# Allegro board DA_Convertor.brd
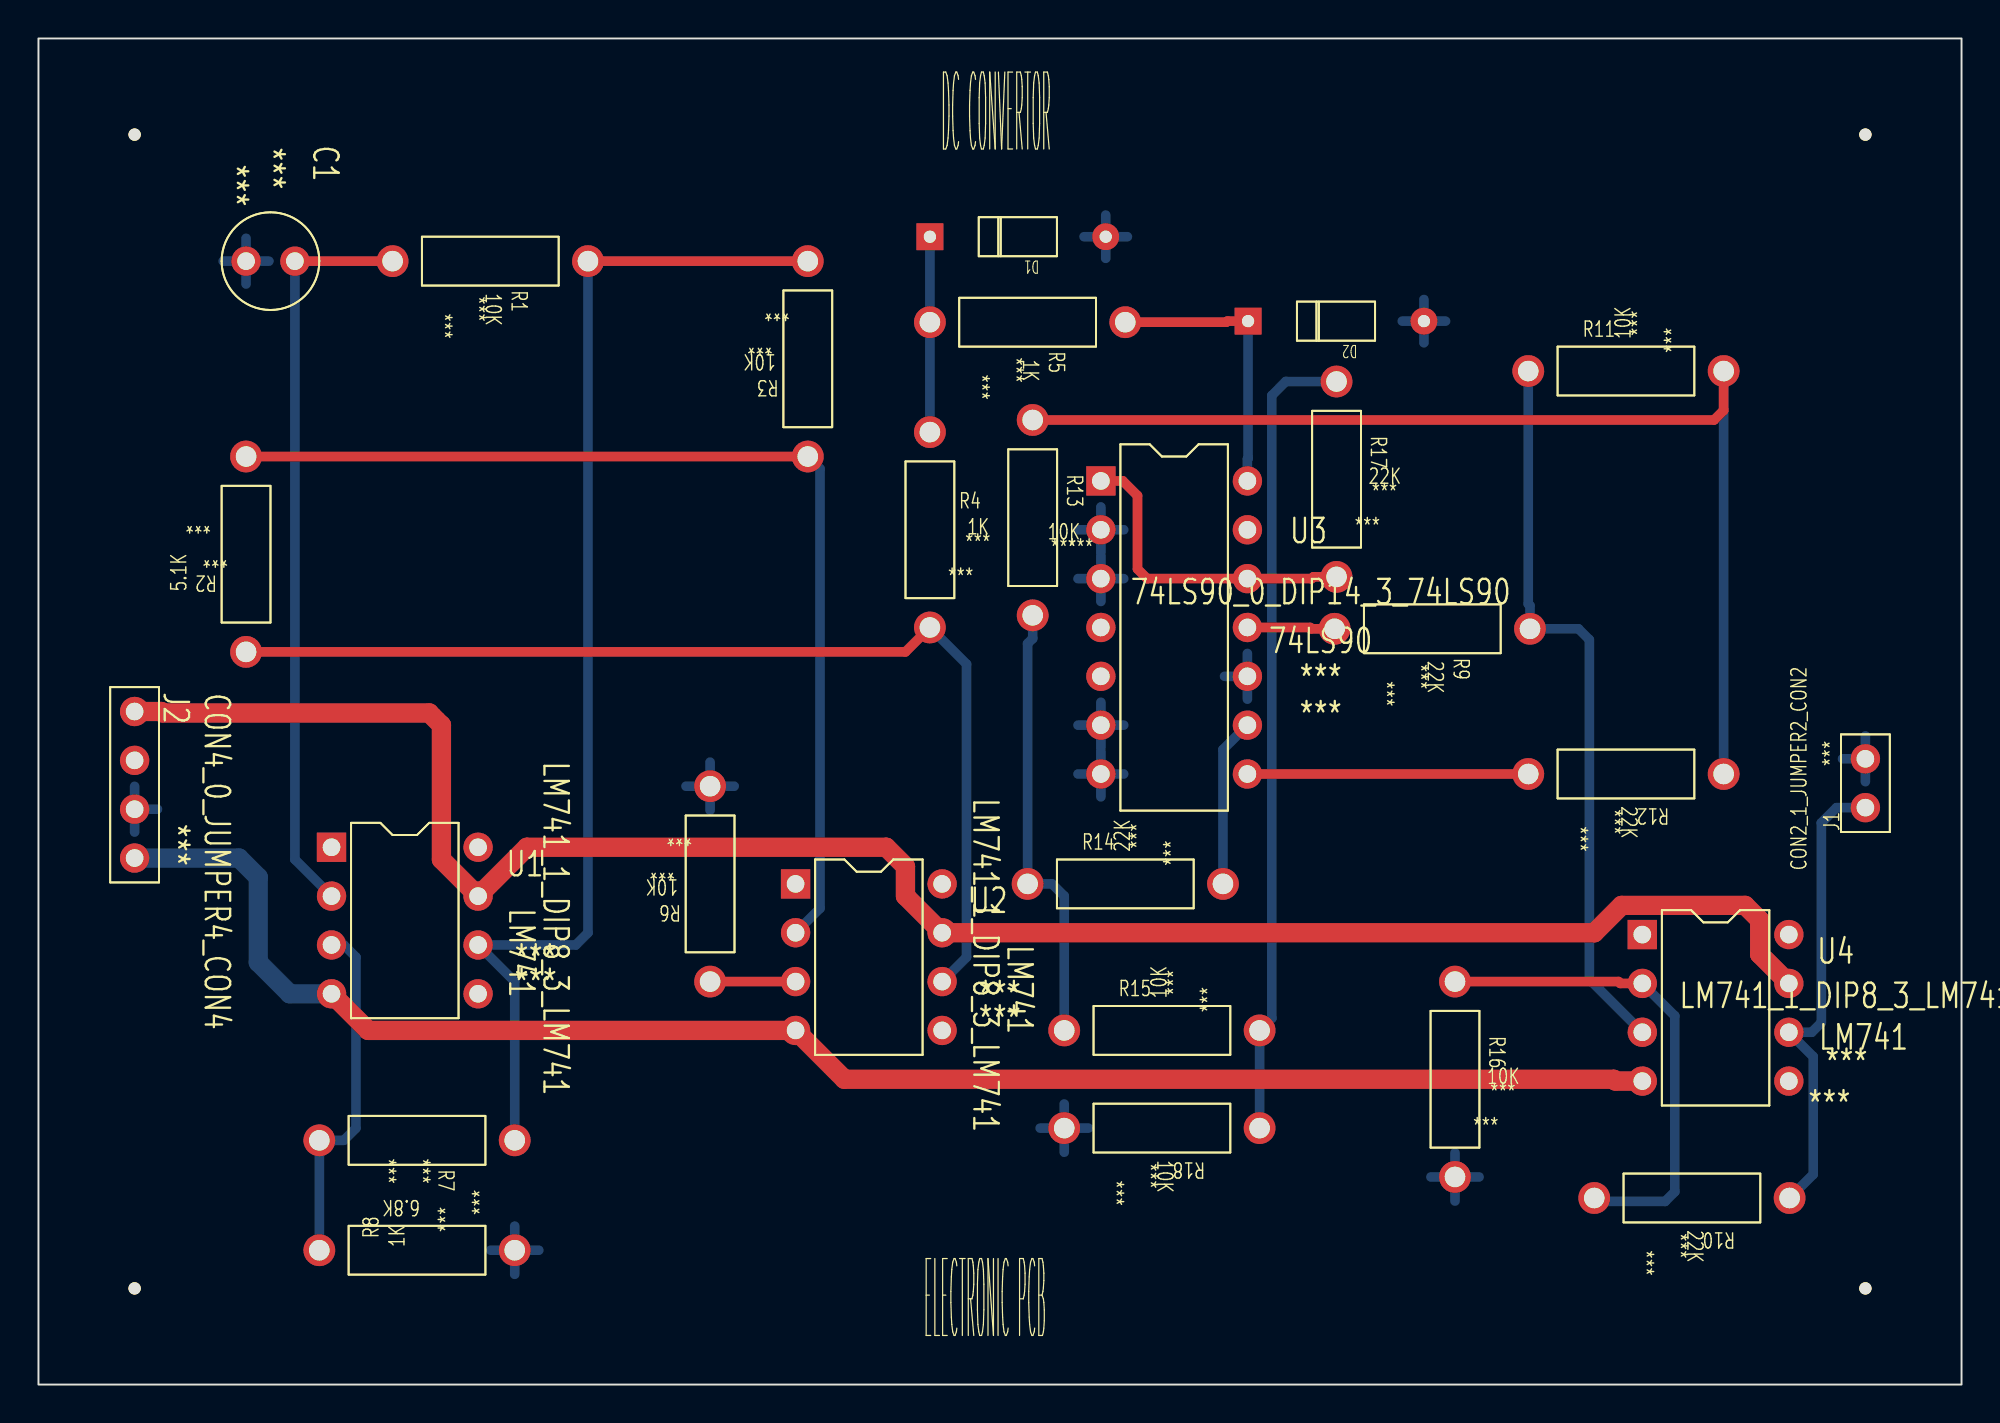
[diagram p0: board, top side]
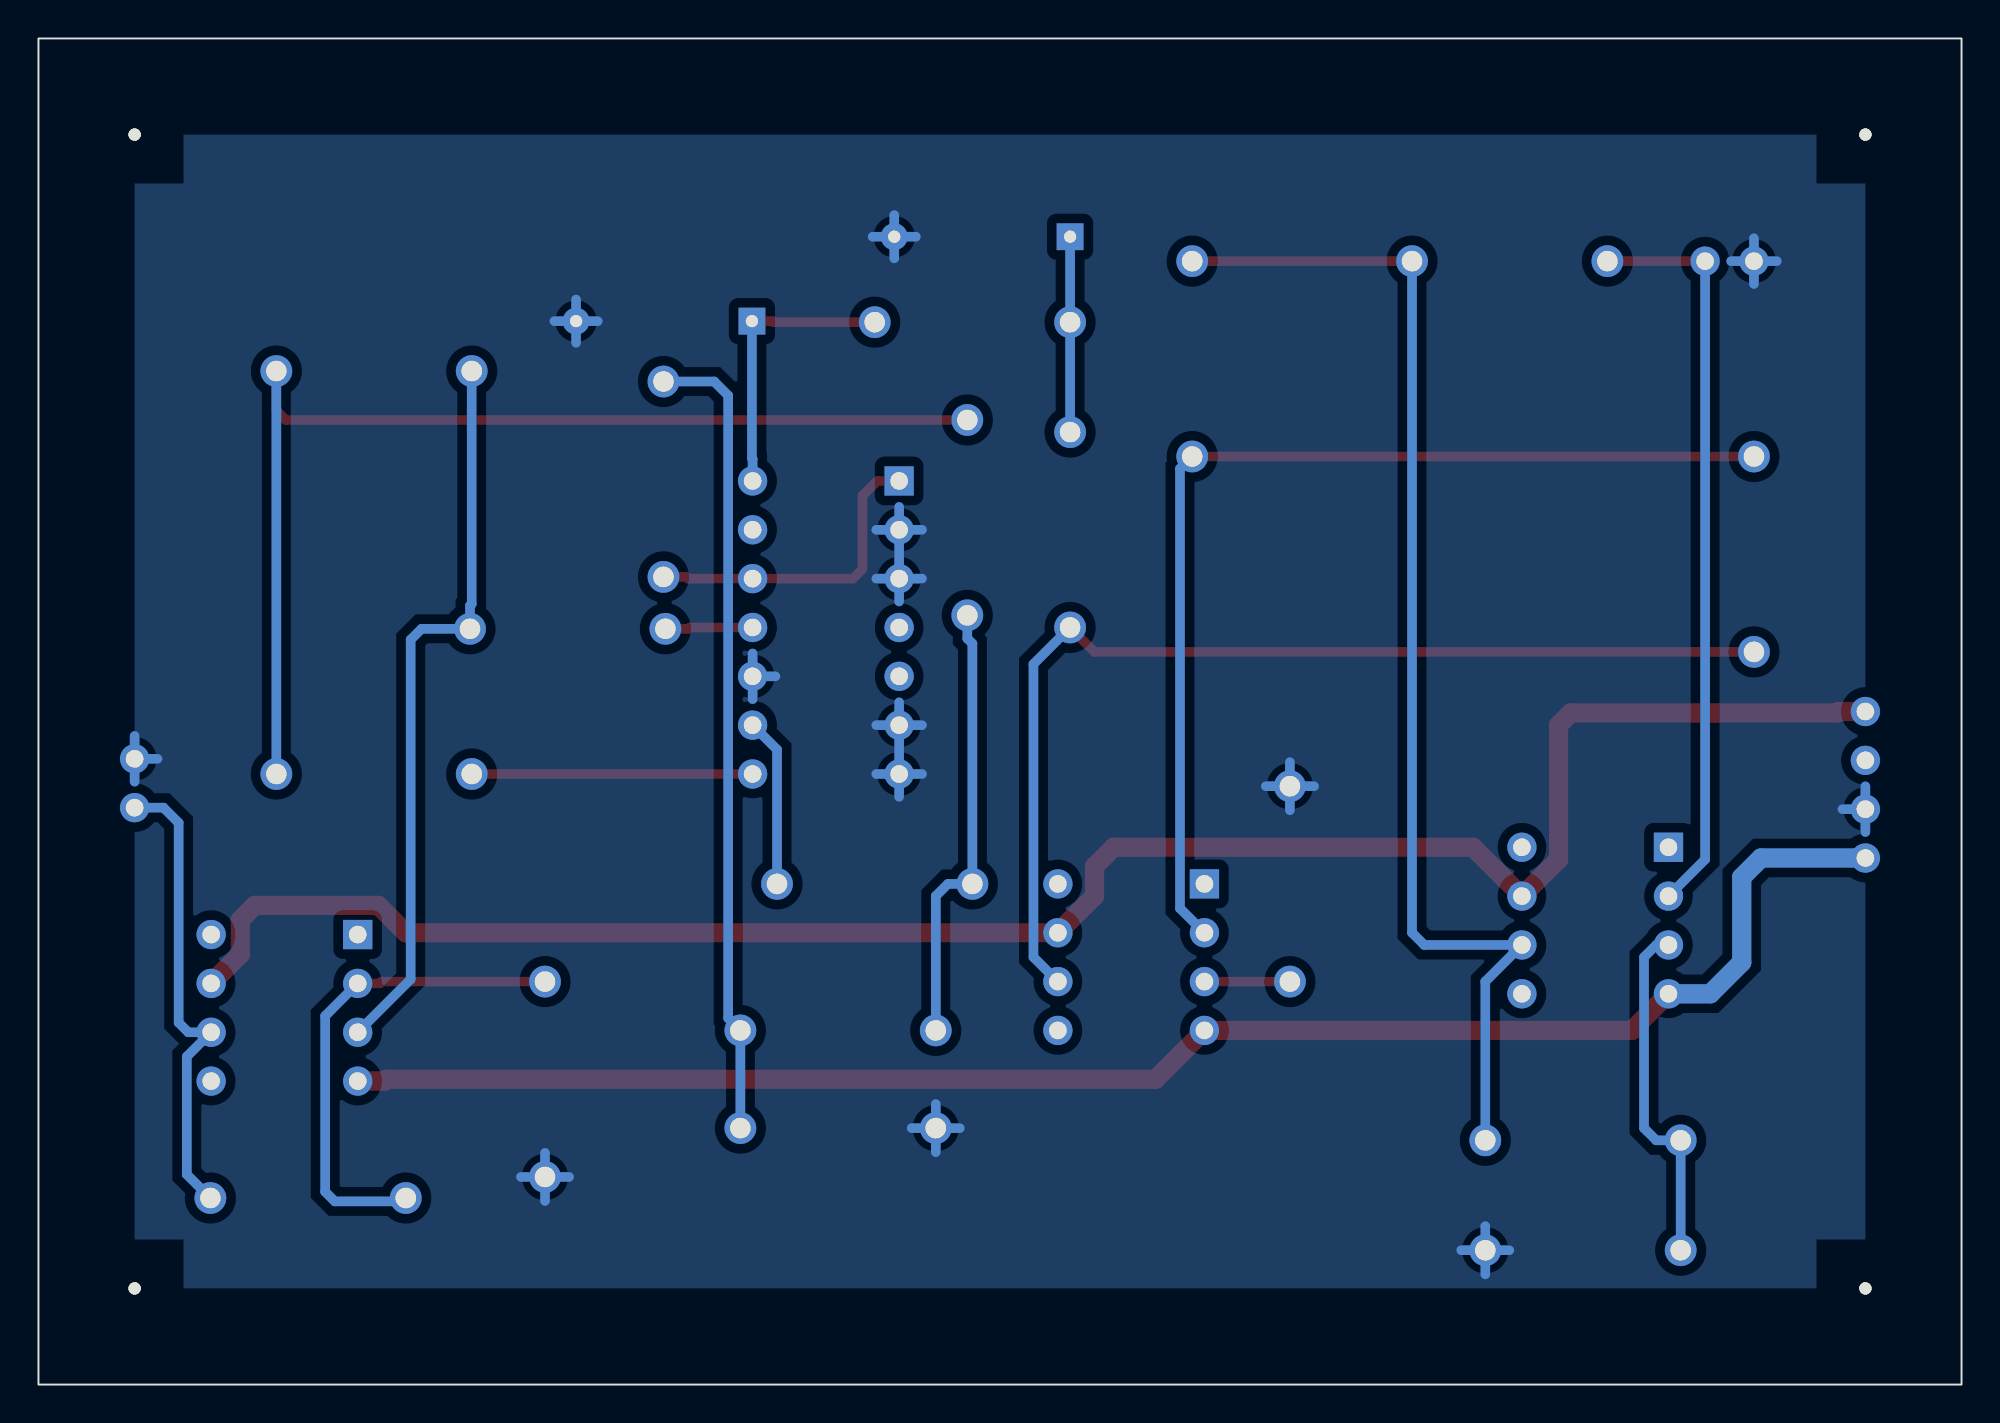
[diagram p1: board, bottom side, seen from below]

Outline 100 x 70 mm; copper layers: TOP, BOTTOM. Coordinates in mm from the lower left corner of the outline.
Outline path: rectangle 0,0 100,70

## Design rules (mm)
constraint set DEFAULT: min track width 0.5, pair gap 0.5
net group POWERNETS: nets +5V +12V -12V

## Placement (name value [footprint] x y rotation side)
C1  0.01uF  [CAP196]  10.79 58.42 270 top
D1  1N4148  [DO35]  46.35 59.69 270 top
D2  RD 5.6A  [DO35]  62.9 55.3 270 top
J1  CON2  [JUMPER2]  95 30 90 top
J2  CON4  [JUMPER4]  5 35 270 top
NOREF  -  [unnamed]  95 5 0 top
NOREF#2  -  [unnamed]  5 65 0 top
NOREF#3  -  [#2]  100 0 90 top
NOREF#4  -  [unnamed]  95 65 0 top
NOREF#5  -  [unnamed]  5 5 0 top
NOREF#6  -  [#2]  0 70 0 top
R1  10K  [RES400]  18.41 58.42 270 top
R2  5.1K  [RES400]  10.79 48.26 180 top
R3  10K  [RES400]  40.01 58.42 180 top
R4  1K  [RES400]  46.35 39.37 0 top
R5  1K  [RES400]  46.35 55.24 270 top
R6  10K  [RES400]  34.92 31.11 180 top
R7  6.8K  [RES400]  14.61 12.7 270 top
R8  1K  [RES400]  24.77 6.99 90 top
R9  22K  [RES400]  67.4 39.3 270 top
R10  22K  [RES400]  80.9 9.7 270 top
R11  10K  [RES400]  87.63 52.7 90 top
R12  22K  [RES400]  77.47 31.75 270 top
R13  10K  [RES400]  51.7 40 0 top
R14  22K  [RES400]  61.59 26.04 90 top
R15  10K  [RES400]  63.5 18.41 90 top
R16  10K  [RES400]  73.66 10.79 0 top
R17  22K  [RES400]  67.5 42 0 top
R18  10K  [RES400]  53.34 13.34 270 top
U1  LM741  [DIP8_3]  15.24 27.94 0 top
U2  LM741  [DIP8_3]  39.37 26.04 0 top
U3  74LS90  [DIP14_3]  55.24 46.99 0 top
U4  LM741  [DIP8_3]  83.4 23.4 0 top

## Library data of the parts
C1 = C: Tolerance: ***; User Part Number: ***
D1 = DIODE
D2 = DIODE BREAKDOWN_0
J1 = CON2_1: User Part Number: ***
J2 = CON4_0: User Part Number: ***
R1-R18 = R: Tolerance: ***; User Part Number: ***
U1 U2 U4 = LM741_1: Tolerance: ***; User Part Number: ***
U3 = 74LS90_0: Tolerance: ***; User Part Number: ***

## Footprints (pads in the part's own frame, mm; a bottom-side part is the same pattern mirrored in y, then rotated)
CAP196
  round 1.524 hole 0.914: 1(0,0) 2(0,2.54)
DIP8_3
  rect 1.524x1.524 hole 0.914: 1(0,0)
  round 1.524 hole 0.914: 2(0,-2.54) 3(0,-5.08) 4(0,-7.62) 5(7.62,-7.62) 6(7.62,-5.08) 7(7.62,-2.54) 8(7.62,0)
DIP14_3
  rect 1.524x1.524 hole 0.914: 1(0,0)
  round 1.524 hole 0.914: 2(0,-2.54) 3(0,-5.08) 4(0,-7.62) 5(0,-10.16) 6(0,-12.7) 7(0,-15.24) 8(7.62,-15.24) 9(7.62,-12.7) 10(7.62,-10.16) 11(7.62,-7.62) 12(7.62,-5.08) 13(7.62,-2.54) 14(7.62,0)
DO35
  rect 1.397x1.397 hole 0.635: 1(0,0)
  round 1.397 hole 0.635: 2(0,9.144)
JUMPER2
  round 1.524 hole 0.914: 1(0,0) 2(2.54,0)
JUMPER4
  round 1.524 hole 0.914: 1(0,0) 2(2.54,0) 3(5.08,0) 4(7.62,0)
RES400
  round 1.651 hole 1.067: 1(0,0) 2(0,10.16)
unnamed
  round 0.635 hole 3.175 unplated: (0,0)

## Nets
+5V: J2.2
+12V: J2.1 U1.7 U2.7 U4.7
-12V: J2.4 U1.4(V-) U2.4(V-) U4.4(V-)
GND: C1.1 D1.2 D2.2 J1.2 J2.3 R6.1 R8.1 R16.1 R18.1 U3.2 U3.3 U3.6 U3.7(R92) U3.10
VCC: U3.5
CLK: D2.1(CATHODE) R5.2 U3.14
OUT: J1.1 R10.2 U4.6
SIG: R9.2 R11.2 U4.3
N00203: R17.1 U3.1 U3.12
N00235: R14.1 U3.9
N00250: R12.1 U3.8
N00254: R9.1 U3.11
N00531: D1.1(K) R4.2 R5.1
N01054: R2.1 R3.2 U2.2
N01088: R1.2 R3.1 R7.2 U1.6
N01160: C1.2 R1.1 U1.2
N01196: R7.1 R8.2 U1.3
N01370: R2.2 R4.1 U2.6
N01517: R6.2 U2.3
N02715: R15.1 R17.2 R18.2
N02816: R13.1 R14.2 R15.2
N02968: R10.1 R16.2 U4.2
N025510: R11.1 R12.2 R13.2

Pads without a net: U1 1 5 8; U2 1 5 8; U3 4 13; U4 1 5 8

## Routing (per net, layer and track width the routed paths; a pad name or vN(x,y) marks a point on that pad's centre or on a via; arc(x,y) is an arc through that point)
+12V: length 101.2
  TOP w1: J2.1 6.39,35 6.46,34.92 20.32,34.92 20.95,34.29 20.95,27.3 U1.7 25.4,27.94 44.09,27.94 45.09,26.94 45.09,25.4 U2.7 80.9,23.5 82.33,24.92 88.75,24.92 89.5,24.16 89.5,22.38 U4.7
-12V: length 85.8
  TOP w1: U4.4 82.01,15.78 81.92,15.88 41.91,15.88 U2.4 17.14,18.41 U1.4
  BOTTOM w1: J2.4 10.43,27.38 11.43,26.38 11.43,21.95 13.06,20.32 U1.4
GND: length 63.5
  BOTTOM w0.5: C1.1 11.98,58.42 ; C1.1 9.61,58.42 ; C1.1 10.79,59.61 ; C1.1 10.79,57.23 ; R18.1 54.59,13.34 ; R18.1 53.34,12.08 ; R18.1 52.09,13.34 ; R18.1 53.34,14.59 ; 55.24,40.72 U3.3 ; U3.3 54.06,41.91 ; U3.3 55.24,43.1 ; U3.3 56.43,41.91 ; J1.2 95,33.73 ; J1.2 95,31.35 ; J1.2 93.81,32.54 ; 55.5,59.69 55.5,60.81 ; 55.5,59.69 56.62,59.69 ; 55.5,59.69 55.5,58.56 ; 55.5,59.69 54.37,59.69 ; 34.92,29.86 R6.1 ; R6.1 34.92,32.37 ; R6.1 36.18,31.11 ; R6.1 33.67,31.11 ; U3.2 55.24,45.64 ; U3.2 56.43,44.45 ; U3.2 54.06,44.45 ; U3.2 55.24,43.26 ; 54.06,31.75 U3.7 ; U3.7 55.24,30.56 ; U3.7 56.43,31.75 ; U3.7 55.24,32.94 ; 72.41,10.79 R16.1 ; R16.1 74.91,10.79 ; R16.1 73.66,12.05 ; R16.1 73.66,9.54 ; U3.6 55.24,35.48 ; U3.6 56.43,34.29 ; U3.6 54.06,34.29 ; U3.6 55.24,33.1 ; 24.77,5.73 R8.1 ; R8.1 26.02,6.99 ; R8.1 23.51,6.99 ; R8.1 24.77,8.24 ; J2.3 5,31.11 ; J2.3 6.19,29.92 ; J2.3 5,28.73 ; U3.10 62.87,38.02 ; U3.10 61.68,36.83 ; U3.10 62.87,35.64 ; 72.04,54.17 D2.2 ; D2.2 72.04,56.42 ; D2.2 73.17,55.3 ; D2.2 70.92,55.3
CLK: length 14.7
  TOP w0.5: R5.2 61.77,55.24 61.82,55.3 D2.1
  BOTTOM w0.5: D2.1 62.9,48.16 62.87,48.13 U3.14
OUT: length 24.6
  BOTTOM w0.5: R10.2 92.29,10.93 92.29,17.05 U4.6 92.21,18.32 92.71,18.82 92.71,29.21 93.5,30 J1.1
SIG: length 38.3
  BOTTOM w0.5: U4.3 80.64,21.07 80.64,38.73 80.08,39.3 R9.2 77.56,40.5 77.47,40.59 R11.2
N00203: length 16.6
  TOP w0.5: R17.1 66.3,42 66.21,41.91 U3.12 57.65,41.91 57.15,42.41 57.15,46.23 56.38,46.99 U3.1
N00235: length 8.8
  BOTTOM w0.5: R14.1 61.59,33.02 U3.9
N00250: length 14.6
  TOP w0.5: U3.8 R12.1
N00254: length 4.6
  TOP w0.5: U3.11 66.13,39.37 66.2,39.3 R9.1
N00531: length 10.2
  BOTTOM w0.5: R4.2 R5.1 D1.1
N01054: length 54.8
  TOP w0.5: R2.1 R3.2
  BOTTOM w0.5: R3.2 40.64,47.62 40.64,24.77 U2.2
N01088: length 63.3
  TOP w0.5: R1.2 R3.1
  BOTTOM w0.5: R1.2 28.57,23.5 27.94,22.86 U1.6 24.77,20.95 R7.2
N01160: length 38.9
  TOP w0.5: C1.2 R1.1
  BOTTOM w0.5: C1.2 13.34,27.3 U1.2
N01196: length 18.3
  BOTTOM w0.5: 14.61,6.99 R7.1 15.88,12.7 16.51,13.34 16.51,22.23 15.88,22.86 U1.3
N01370: length 55.8
  TOP w0.5: 10.79,38.1 45.09,38.1 R4.1
  BOTTOM w0.5: U2.6 48.26,22.23 48.26,37.47 R4.1
N01517: length 4.4
  TOP w0.5: R6.2 U2.3
N02715: length 42
  BOTTOM w0.5: R17.2 64.86,52.16 64.14,51.44 64.14,19.05 R15.1 R18.2
N02816: length 23.2
  BOTTOM w0.5: R15.2 53.34,25.4 52.7,26.04 R14.2 51.44,38.53 51.7,38.8 R13.1
N02968: length 25.8
  TOP w0.5: U4.2 82.26,20.86 82.17,20.95 R16.2
  BOTTOM w0.5: R10.1 81.08,9.53 84.59,9.53 85.09,10.03 85.09,19.17 U4.2
N025510: length 59.1
  TOP w0.5: R13.2 87.13,50.16 87.63,50.66 R11.1
  BOTTOM w0.5: R12.2 R11.1

## Copper pours and planes (outline as drawn; the poured copper is in the pictures)
GND on BOTTOM: 95,5 95,65 5,65 5,5 ; 1 cut-out

## Text on the board
Ref Des/Silkscreen Top: ELECTRONIC PCB | DC CONVERTOR
DIMENSION: FIGURE | FINISHED_SIZE | 0.635 | 0.914 | 1.067 | 3.175 | DRILL CHART: TOP to BOTTOM | ALL UNITS ARE IN MILLIMETERS | PLATED | NON-PLATED | QTY | 4 | 46 | 36
